# Altium PCB RX_Board.PcbDoc (part 5 of 5)
Units mm, origin at the board's own origin, x right, y up, seen from the top; angles counter-clockwise.
Board outline 69 x 69 mm, 4 copper layers (Top Layer, Int1 (GND), Int2 (GND), Bottom Layer), stack 1.586 mm thick; 118 components, 59 nets, 325 pads, 477 vias.
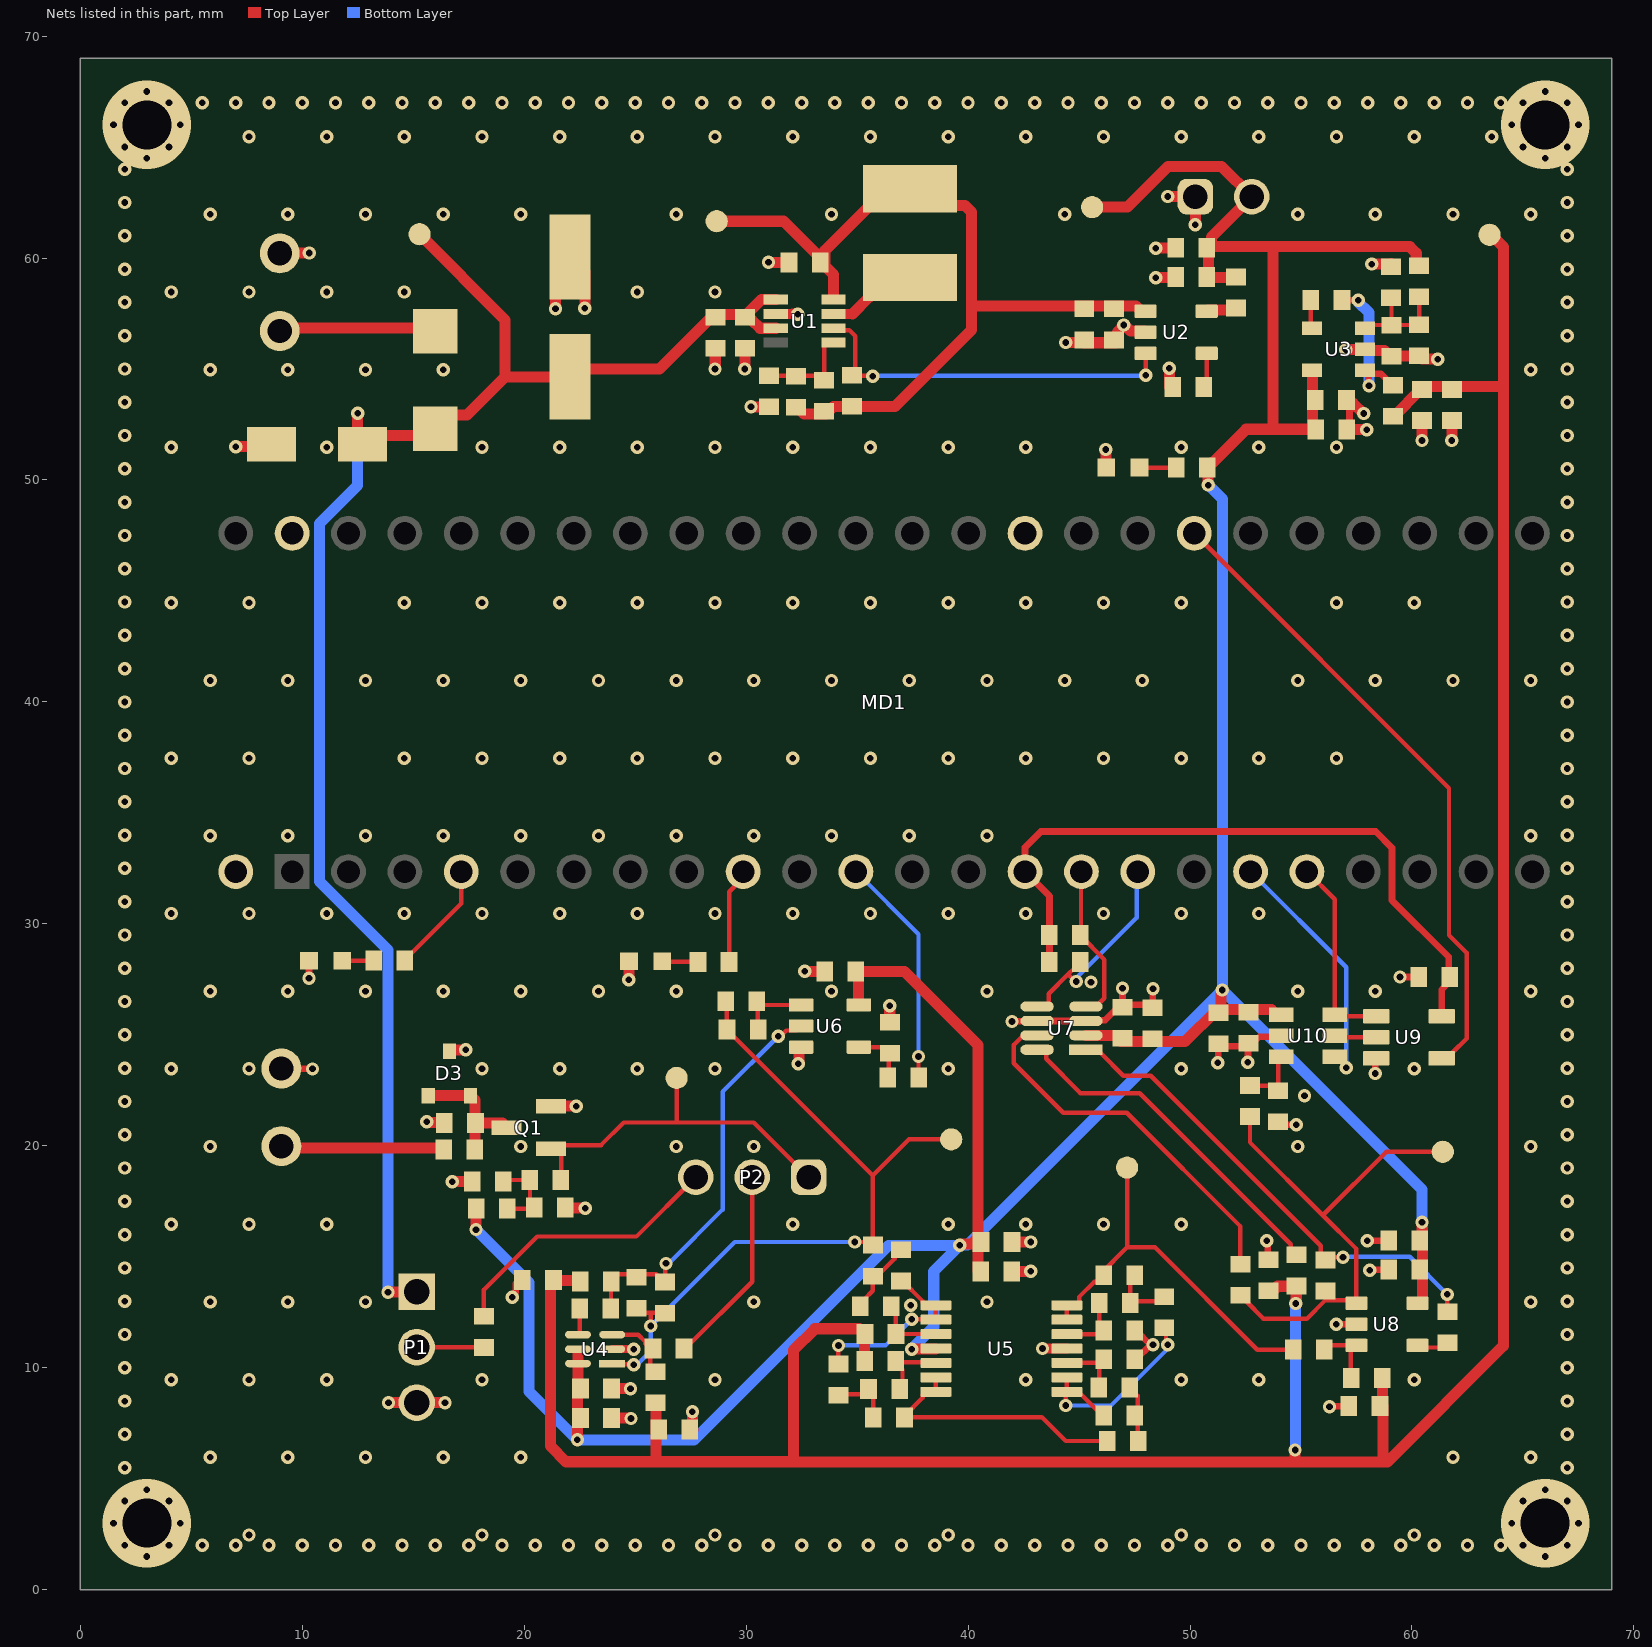
[diagram p4: the nets of this part, all layers, seen from the top]

## Part data (continued)
U4: library part CMP-09116-000031-1, "IC OPAMP VFB 1 CIRCUIT SC70-6", Input Bias Current=-1.2uA, Input Offset Voltage=0.020mV, Manufacturer="Analog Devices", Max Supply Voltage=11V, Min Supply Voltage=2.7V, Nominal Supply Current=1-1000uA, Output Current Per Channel=80mA, Package=KS-6, Temperature="-40°C to +125°C", Temperature Range High=+125°C, Temperature Range Low=-40°C, Voltage Gain=130dB, Automotive=No, Category=IC, ComponentLink2Description=Datasheet, ComponentLink2URL=https://www.analog.com/media/en/technical-documentation/data-sheets/ADA4807-1_4807-2_4807-4.pdf, Device Class L1="Integrated Circuits (ICs)", Device Class L2="Linear ICs", Device Class L3="Amplifiers - Op Amps", Digikey Description="IC OPAMP VFB 1 CIRCUIT SC70-6", Height=1.1mm, Ipc Land Pattern Name=SOT65P210X95-6, Lead Free=Yes, Manufacturer Part Number=ADA4807-1AKSZ-R2, Mouser Description="Operational Amplifiers - Op Amps Ultra Low Pwr 120MHz High Spd R/R AMP", Number of Channels=1, Octopart=https://octopart.com/ada4807-1aksz-r2-analog+devices-52932031, RoHS=TRUE
U5: library part CMP-0272-01739-3, "20 MHz, Low Noise, RRIO, CMOS Operational Amplifier, 1.8 to 5.5 V, -40 to 125 degC, 14-pin SOP (PW14), Green (RoHS & no Sb/Br)", Manufacturer="Texas Instruments", Rating=Catalog, Total Supply Voltage(Max)(+5V is 5, +/-5V is 10)=5.5, Total Supply Voltage(Min)(+5V is 5, +/-5V is 10)=1.8, CMRR(Min)(dB)=90, Code_JEDEC=MO-153, ComponentLink1Description="Manufacturer URL", ComponentLink1URL=http://www.ti.com/, ComponentLink2Description=Datasheet, ComponentLink2URL=http://www.ti.com/lit/ds/symlink/opa4322.pdf, ComponentLink3Description="Package Specification", ComponentLink3URL=http://www.ti.com/litv/pdf/mpds360, DatasheetVersion=SBOS538E, Eco-Plan="Green (RoHS & no Sb/Br)", GBW(Typ)(MHz)=20, IIB(Max)(pA)=10, Iq per channel(Max)(mA)=1.65, Mounting Technology="Surface Mount", Number of Channels=4, Offset Drift(Typ)(uV/C)=1.8, PackageDescription="14-Pin Plastic Small Outline, Body 5 x 4.4 mm, Pitch 0.65 mm", PackageReference=PW0014A, PackageVersion="4040064-3/G, 02/2011", Packing="LARGE T&R", PartNumber=OPA4322AIPWR, Slew Rate(Typ)(V/us)=10, Sub Family="High Output Current Amplifier (>=50mA), Low Input Bias Current Amp (<=10pA), Low Noise Amp (<=10nV/rtHz), Low Supply Voltage Amplifier (<=2.7V), Precision Amplifier", Vio (25C)(Max)(mV)=2
U6: library part CMP-04892-000007-1, "IC SWITCH SPST SOT23-5", Ambient Temperature Range High=+85°C, Ambient Temperature Range Low=-40°C, JLCPCB Part Number=C353035, Manufacturer="Texas Instruments", Max Junction Temp=+150°C, Max Supply Voltage=5.5V, Min Supply Voltage=1.65V, Nominal Supply Current=0.01uA, On State Resistance=0.7Ω, Package=DBV0005A, Temperature="-40°C to +85°C", Automotive=No, Category=IC, ComponentLink2Description=Datasheet, ComponentLink2URL=http://www.ti.com/lit/ds/symlink/ts5a3166.pdf, Device Class L1="Integrated Circuits (ICs)", Device Class L2="Interface ICs", Device Class L3="Analog Switches", Digikey Description="IC SWITCH SPST SOT23-5", Height=1.45mm, Lead Free=Yes, Manufacturer Part Number=TS5A3166DBVR, Mouser Description="1-Ohm SPST Analog Switch 5-V/3.3-V Single-Channel Analog Switch 5-SOT-23 -40 to 85", Number of Circuits=1, Octopart=https://octopart.com/ts5a3166dbvr-texas+instruments-512330, RoHS=TRUE, Standoff Height=0mm, Temperature Range High=+85°C, Temperature Range Low=-40°C, Throw Configuration=SPST-NO
U7: library part CMP-09083-000109-1, "IC DGT POT 10KOHM 256TAP SOT23-8", Case/Package=SOT-23, Frequency=400kHz, JLCPCB Part Number=C144256, Max Operating Temperature=125°C, Max Supply Current=3uA, Max Supply Voltage=5.5V, Min Operating Temperature=-40°C, Min Supply Voltage=2.7V, Package Quantity=3000, Resistance=10kR, Resistance Tolerance=30%, Temperature Coefficient=45ppm/°C, -3db Bandwidth=1.2MHz, Contact Plating=Gold, Interface=I2C, Lead Free="Contains Lead", Memory Type=Volatile, Mount="Surface Mount", Nominal Supply Current=3uA, Number of Circuits=1, Number of Elements=1, Number of Pins=8, Number of Positions=256, Number of Taps=256, Operating Supply Current=3uA, Operating Supply Voltage=5.5V, Packaging="Tape and Reel", Quiescent Current=3uA, Radiation Hardening=No, REACH SVHC="No SVHC", RoHS Compliant=Yes, Series=-, Supply Current=3uA, Taper=Linear, Tolerance=30%
U8: library part CMP-0272-00923-3, "50 MHz, Low-Noise, Single-Supply Rail-to-Rail Operational Amplifier, 2.2 to 5.5 V, -40 to 125 degC, 5-pin SOT23 (DBV5), Green (RoHS & no Sb/Br)", JLCPCB Part Number=C96626, Manufacturer="Texas Instruments", Total Supply Voltage(Max)(+5V is 5, +/-5V is 10)=5.5, Total Supply Voltage(Min)(+5V is 5, +/-5V is 10)=2.2, CMRR(Min)(dB)=100, Code_JEDEC=MO-178, ComponentLink1Description="Manufacturer URL", ComponentLink1URL=http://www.ti.com/, ComponentLink2Description=Datasheet, ComponentLink2URL=http://www.ti.com/general/docs/lit/getliterature.tsp?genericPartNumber=OPA365&fileType=pdf, ComponentLink3Description="Package Specification", ComponentLink3URL=http://www.ti.com/litv/pdf/mpds018i, DatasheetVersion=SBOS365D, Eco-Plan="Green (RoHS & no Sb/Br)", IIB(Max)(pA)=10, Iq per channel(Max)(mA)=5, Mounting Technology="Surface Mount", Number of Channels=1, Offset Drift(Typ)(uV/C)=1, PackageDescription="5-Pin Plastic Small Outline, Body 1.6 x 2.9 mm, Pitch 0.95 mm", PackageReference=DBV0005A, PackageVersion="4073253-4/K, 03/2006", PartNumber=OPA365AIDBVR, Slew Rate(Typ)(V/us)=25, Sub Family="High Speed Amplifier (>=50MHz), Low Input Bias Current Amp (<=10pA), Low Noise Amp (<=10nV/rtHz), Low Offset Voltage Amplifier (<=500uV), Low Supply Voltage Amplifier (<=2.7V)", Vio (25C)(Max)(mV)=0.2
U9: library part CMP-0859-00019-3, "Single Bus Buffer Gate With 3-State Outputs, DBV0005A, LARGE T&R", F @ Nom Voltage(Max)(Mhz)=150, Generic Part Number=SN74LVC1G125, ICC @ Nom Voltage(Max)(mA)=0.01, JLCPCB Part Number=C23654, Manufacturer="Texas Instruments", Operating Temperature Range(C)="-40 to 125,-40 to 85", Rating=Catalog, tpd @ Nom Voltage(Max)(ns)=9,5.5,4.5,4, Voltage(Nom)(V)=1.8,2.5,3.3,5, 3-State Output=Yes, Bits(#)=1, DatasheetVersion=SCES223T, Input Type=CMOS/TTL, Logic=True, Output Drive (IOL/IOH)(Max)(mA)=32/-32, Output Type=CMOS, PackageReference=DBV0005A, Schmitt Trigger=No, Sub-Family="Non-Inverting Buffer/Driver", Technology Family=LVC, VCC(Max)(V)=5.5, VCC(Min)(V)=1.65
U10: library part CMP-0054-00266-2, "Single Channel, 0.5 to 1 MSPS, 12-Bit A/D Converter, 6-pin SOT-23, Pb-Free", JLCPCB Part Number=C74860, Manufacturer="National Semiconductor", PackageTopMarking=X01C*XTT, PowerWise=Y, Code_IPC=SOT26A-6, Code_JEDEC=MO-178-AB, ComponentLink1Description="ADC121S101 Datasheet", ComponentLink1URL=http://www.national.com/ds/AD/ADC121S101.pdf, ComponentLink2Description="ADC121S101 Web Page", ComponentLink2URL=http://www.national.com/pf/AD/ADC121S101.html, ComponentLink3Description="MF06A Package Page", ComponentLink3URL=http://www.national.com/packaging/folders/mf06a.html, CompType="ADC IC", DatasheetVersion=Jun-2004, PackageDescription="Molded SOT-23, .115 x .063 x .040in Body, 6 Lead, .0375in in Pitch", PackageReference=MF06A, PackageVersion="revC, Sep-2005", PinCount=6, RevisionNote="Component URLs added", RoHS=Y

## Via types
v1: diameter 0.6, hole 0.3, Top Layer to Bottom Layer, tented both sides, 473 vias
v2: diameter 4, hole 2.2, Top Layer to Bottom Layer, 4 vias

## Nets (pads, with @x,y where several pads share a name; then routed paths per layer and width w, separated by ;. In a path a pad name is that pad's centre, name@x,y a point inside that pad or via, vN(x,y) a via of type N, cw(c..) or ccw(c..) an arc to the next point about the centre after c; other vN are vias at no path point)
2V5: C13.1 C14.2 C25.2 C34.2 C46.2 C48.2 R3.2 R12.1 R21.1 R23.1 R24.1 R34.2 R36.1 TP4.1 | length 136.1
  Top Layer w0.5: R23.1@22.512,13.89 22.474,13.928 21.487,13.928 21.449,13.966 21.449,13.894 21.18,13.625 21.18,6.473 21.887,5.766 25.94,5.766 ; R12.1@25.93,8.415 25.935,8.41 25.935,7.215 25.94,7.21 25.94,5.766 ; R21.1@35.328,10.309 35.333,10.314 35.333,11.522 35.339,11.528 35.339,11.578 35.259,11.658 35.209,11.658 35.109,11.758 33.094,11.758 32.127,10.791 32.127,5.766 ; C48.2@53.539,13.342 53.612,13.342 53.943,13.673 54.809,13.673 54.784,13.647 54.784,12.925 v1(54.759,12.899) ; v1(54.733,6.295) 54.733,5.762 ; R34.2@58.645,9.547 58.665,9.526 C46.2@58.665,8.184 ; C46.2@58.685,8.277 58.685,5.976 58.899,5.762 ; R3.2@59.153,52.879 59.233,52.959 59.283,52.959 60.298,53.975 60.298,54.126 60.376,54.204 60.448,54.204 61.794,54.204 64.091,54.204 64.131,54.163 ; TP4.1@63.496,61.047 63.588,61.047 64.131,60.504 64.131,54.163 ; 25.94,5.766 32.127,5.766 ; 32.127,5.766 32.127,5.762 54.733,5.762 ; 54.733,5.762 58.899,5.762 ; 58.899,5.762 64.131,10.994 64.131,54.163
  Bottom Layer w0.3: v1(54.733,6.295) v1@54.746,6.308 ; v1@54.746,12.887 v1(54.759,12.899)
  Bottom Layer w0.5: v1@54.746,6.308 v1@54.746,12.887
2V5_OUT: R3.1 R9.2 U3.1 | length 7.1
  Top Layer w0.3: R9.2@56.83,58.1 v1(57.578,58.1) ; v1(58.061,54.24) 58.043,54.257 58.043,54.791 57.893,54.941 U3.1@57.889,54.941 58.039,54.791 58.592,54.791 59.103,54.279 R3.1@59.153,54.279
  Bottom Layer w0.5: v1(57.578,58.1) 57.578,58.019 58.061,57.537 v1(58.061,54.24)
5V: C2.2 C3.1 C15.2 C16.1 C17.2 C18.2 C20.1 C21.2 C36.2 C37.2 C38.2 C40.1 C41.2 C44.2 C45.2 P3.2 R2.2 R10.1 R33.1 R38.2 TP2.1 U3.5 U4.5 U4.6 U5.4 U6.5 U7.2 U8.5 U10.1 | length 172.3
  Top Layer w0.5: v1(17.827,16.227) R10.1@17.827,17.167 ; v1(22.399,6.753) 22.404,6.758 22.404,7.738 22.409,7.743 22.409,9.064 22.417,9.071 22.417,10.185 U4.6@22.424,10.192 22.424,10.639 ; U6.5@35.078,26.346 35.063,26.361 35.063,27.86 37.132,27.859 40.454,24.537 40.454,15.668 40.449,15.663 C21.2@40.449,15.456 ; v1(37.461,10.842) 37.474,10.855 U5.4@38.537,10.855 ; v1(39.62,15.516) 39.678,15.573 40.276,15.573 40.314,15.611 C21.2@40.314,15.725 ; C20.1@40.449,14.352 C21.2@40.449,15.322 ; U7.2@45.31,24.978 46.632,24.978 46.901,24.708 48.294,24.708 48.307,24.695 49.78,24.695 51.207,26.122 51.279,26.122 C45.2@51.292,26.135 ; TP2.1@45.589,62.291 47.189,62.291 49.018,64.12 51.424,64.12 P3.2@52.781,62.763 50.965,60.947 50.965,60.54 50.831,60.406 50.831,59.198 50.887,59.142 50.899,59.131 R38.2@52.066,59.131 ; v1@50.809,49.782 50.809,50.594 50.796,50.606 50.976,50.787 51.026,50.787 52.523,52.284 53.768,52.284 ; R33.1@50.809,50.682 R33.1@50.822,50.669 ; C3.1@50.944,60.519 53.743,60.519 ; v1(51.457,27.022) 51.399,26.964 51.399,26.243 C45.2@51.292,26.135 ; U10.1@54.124,25.921 U10.1@54.117,25.914 53.892,25.914 53.659,26.148 52.625,26.148 52.612,26.135 C45.2@51.292,26.135 ; U3.5@55.521,54.909 55.521,53.605 55.526,53.599 55.526,52.289 55.531,52.284 53.768,52.284 ; R2.2@60.321,59.639 60.271,59.639 60.191,59.719 60.191,60.226 59.898,60.519 53.743,60.519 ; U8.5@60.324,12.91 60.474,13.06 60.474,14.423 60.474,15.744 60.461,15.757 60.461,16.544 v1(60.448,16.557) ; 53.743,60.519 53.743,52.309 53.768,52.284
  Bottom Layer w0.5: v1(17.827,16.227) 20.215,13.839 20.215,8.937 v1(22.399,6.753) 27.657,6.753 36.42,15.516 v1(39.62,15.516) ; v1(37.461,10.842) 38.452,11.833 38.452,14.347 v1(39.62,15.516) ; v1(50.822,49.769) 51.457,49.134 v1(51.457,27.022) ; v1(60.448,16.557) 60.448,18.03 v1(51.457,27.022) ; v1(39.62,15.516) 39.639,15.535 39.97,15.535 v1(51.457,27.022)
5V25: C1.2 C6.1 C7.2 C10.2 L1.2 R1.2 R4.1 TP1.1 U1.8 U2.1 | length 38.7
  Top Layer w0.5: TP1.1@28.673,61.656 31.681,61.656 C10.2@33.457,59.88 ; R1.2@32.254,53.286 32.304,53.286 32.618,52.972 C1.2@33.517,52.972 ; C1.2@33.59,52.972 33.929,53.311 34.769,53.311 36.71,53.311 40.154,56.754 40.154,57.821 ; U1.8@33.935,58.354 33.935,59.258 33.541,59.652 33.541,60.327 36.337,63.123 L1.2@37.385,63.123 38.142,62.366 39.861,62.366 40.154,62.073 40.154,57.821 ; U2.1@47.999,57.603 47.799,57.603 47.565,57.836 46.58,57.836 45.234,57.836 40.169,57.836 40.154,57.821
5V_LDO: R38.1 U2.5 | length 1.4
  Top Layer w0.5: U2.5@50.749,57.603 50.813,57.667 52.002,57.667 R38.1@52.066,57.731
5V_PG: R4.2 U1.6 U2.3 | length 17.2
  Top Layer w0.2: U1.6@33.935,56.836 34.018,56.753 34.652,56.753 34.921,56.483 34.921,54.863 34.769,54.711 34.789,54.691 35.689,54.691 v1(35.709,54.671) ; U2.3@47.999,55.703 48.002,55.699 v1(48.002,54.722)
  Bottom Layer w0.2: v1(35.709,54.671) 35.734,54.697 47.977,54.697 v1(48.002,54.722)
AMP_OUT: C42.2 R31.1 R32.1 TP8.1 U8.1 | length 23.3
  Top Layer w0.2: R31.1@52.269,13.252 52.319,13.252 52.549,13.022 52.549,12.972 53.308,12.214 55.267,12.214 56.105,13.052 ; R32.1@52.701,21.307 52.701,20.153 55.985,16.869 ; C42.2@56.105,13.331 56.105,13.052 ; TP8.1@61.388,19.732 58.848,19.732 55.985,16.869 ; 55.985,16.869 57.498,15.356 U8.1@57.498,12.91 57.356,13.052 56.105,13.052
BP_OUT: C33.2 C39.1 TP7.1 U5.13 U5.14 | length 17.5
  Top Layer w0.2: U5.13@44.45,12.167 U5.14@44.45,12.817 44.875,12.817 45,12.942 45,13.189 45.681,13.869 45.753,13.869 45.981,14.097 45.981,14.169 45.981,14.242 47.164,15.425 ; TP7.1@47.164,19.021 47.164,15.425 ; C39.1@54.515,10.817 53.03,10.817 48.421,15.425 47.164,15.425
Buck_SW: L1.1 U1.7 | length 4.2
  Top Layer w0.45: U1.7@33.935,57.486 34.785,57.486
  Top Layer w0.5: 34.785,57.486 35.525,58.225 35.525,58.311 36.337,59.123 L1.1@37.385,59.123
G: C24.1 R13.1 R15.1 R23.2 U6.2 | length 18.4
  Top Layer w0.2: R15.1@23.912,12.671 23.912,13.89 23.912,13.94 24.142,14.17 24.192,14.17 24.232,14.21 25.066,14.21 25.955,14.21 26.286,13.879 26.361,13.954 26.361,14.677 v1(26.387,14.703) ; v1(31.441,24.939) 31.55,24.939 31.807,25.196 32.278,25.196 U6.2@32.478,25.396
  Bottom Layer w0.2: v1(26.387,14.703) 26.514,14.703 28.939,17.128 28.939,22.437 v1(31.441,24.939)
GAIN_OUT: C24.2 C29.1 C35.1 R13.2 R26.1 TP5.1 U4.1 | length 34.2
  Top Layer w0.2: U4.1@23.965,10.192 23.995,10.161 24.908,10.161 v1(24.939,10.131) ; C24.2@25.066,12.554 25.141,12.479 25.739,12.479 ; v1(25.701,11.883) 25.701,12.441 25.739,12.479 ; R13.2@26.336,12.479 25.739,12.479 ; C35.1@28.948,26.514 29.128,26.333 R26.1@29.128,25.556 ; R26.1@29.127,25.244 29.127,25.194 29.357,24.964 29.407,24.964 35.709,18.662 ; v1(34.896,15.668) 35.698,15.668 35.709,15.658 35.709,18.662 ; TP5.1@39.239,20.291 37.337,20.291 35.709,18.662
  Bottom Layer w0.2: v1(24.939,10.131) 25.016,10.207 25.153,10.207 25.701,10.755 v1(25.701,11.883) 29.486,15.668 v1(34.896,15.668)
GND: C2.1 C3.2 C4.1 C5.2 C6.2 C7.1 C8.1 C9.1 C10.1 C11.1 C12.2 C13.2 C14.1 C15.1 C16.2 C17.1 C18.1 C20.2 C21.1 C22.1 C23.1 C25.1 C28.1 C31.1 C34.1 C36.1 C37.1 C38.1 C40.2 C41.1 C43.1 C44.1 C45.1 C46.1 C47.1 C48.1 D2.2 D3.3 D4.1 D5.1 D6.1 J1.1 J2.1 MD1.43 MD1.45 MD1.46 P1.3 P3.1 Q1.2 R5.1 R7.2 R20.1 R28.1 U1.2 U2.2 U3.2 U4.2 U5.11 U6.3 U7.3 U7.6 U8.2 U9.3 U10.2 | length 71.7
  Top Layer w0.3: J2.1@9.064,23.486 9.074,23.476 10.451,23.476 v1(10.461,23.466) ; v1(10.309,27.555) D4.1@10.308,28.342 ; v1(19.465,13.179) 19.465,13.26 19.615,13.411 19.615,13.788 C34.1@19.793,13.966 ; v1(41.982,25.599) 41.996,25.613 43.095,25.613 U7.6@43.109,25.628 U7.3@45.31,25.628 45.339,25.657 46.169,25.657 46.889,26.376 C36.1@46.961,26.376 ; v1(46.961,27.098) C36.1@46.961,26.376 ; C31.1@47.636,10.385 47.636,10.457 48.167,10.988 48.275,10.988 v1(48.332,11.045) 48.275,11.103 48.142,11.103 47.636,11.608 C28.1@47.636,11.68 ; v1(48.332,27.073) 48.32,27.06 48.32,26.364 48.307,26.351 48.294,26.364 46.974,26.364 C36.1@46.961,26.376 ; v1(51.253,23.745) 51.266,23.758 51.266,24.454 51.279,24.467 51.292,24.48 52.612,24.48 52.612,23.783 v1(52.6,23.771) ; C44.1@52.697,24.492 53.117,24.912 54.065,24.912 U10.2@54.117,24.964 ; v1(53.463,15.719) 53.501,15.681 53.501,15.175 53.552,15.124 C48.1@53.565,15.124 ; C43.1@53.971,20.962 53.976,20.956 54.779,20.956 v1(54.784,20.951) ; v1(56.283,8.251) 56.295,8.264 57.017,8.264 C46.1@57.03,8.277 ; v1(56.587,11.96) U8.2@57.498,11.96 ; C16.2@57.176,53.605 57.181,53.599 57.181,53.527 57.181,52.289 C15.1@57.187,52.284 ; v1(57.984,15.719) 57.997,15.732 58.729,15.732 C41.1@58.742,15.744 ; v1(58.098,14.398) 58.111,14.411 58.729,14.411 C40.2@58.742,14.423 ; v1(58.34,23.263) 58.34,23.889 U9.3@58.389,23.938 ; v1(59.458,27.606) C47.1@60.179,27.606
  Top Layer w0.35: U4.2@23.965,10.842 v1(24.939,10.842)
  Top Layer w0.45: U1.2@31.335,57.486 v1@32.097,57.486 ; v1(43.354,10.867) U5.11@44.45,10.867
  Top Layer w0.5: v1(7,51.5) 8.51,51.5 D2.2@8.614,51.605 ; J1.1@8.988,60.21 8.995,60.217 10.306,60.217 v1(10.312,60.223) ; v1(13.89,8.429) P1.3@15.16,8.429 v1(16.43,8.429) ; v1(15.617,21.078) 15.636,21.059 16.359,21.059 R20.1@16.39,21.027 ; D3.3@16.633,24.263 16.681,24.31 17.351,24.31 v1(17.37,24.329) ; v1(16.76,18.386) C22.1@17.533,18.386 ; Q1.2@21.215,21.784 21.217,21.787 22.346,21.787 v1(22.348,21.789) ; v1(21.412,57.709) 21.412,59.388 C5.2@22.069,60.045 22.733,59.381 v1(22.733,57.734) ; C23.1@21.982,17.217 21.995,17.205 22.742,17.205 v1(22.755,17.192) ; C17.1@24.065,7.743 24.078,7.731 24.799,7.731 v1(24.812,7.718) ; C18.1@24.065,9.064 24.071,9.058 24.787,9.058 v1(24.792,9.053) ; v1(24.71,27.479) 24.716,27.485 24.716,28.311 D5.1@24.722,28.317 ; v1(27.581,8.023) 27.588,8.015 27.588,7.217 C25.1@27.596,7.21 ; v1(28.597,55.002) 28.609,55.014 28.609,55.787 C8.1@28.622,55.799 ; v1(29.943,55.002) C9.1@29.943,55.799 ; v1(30.222,53.3) 30.229,53.293 31.028,53.293 R5.1@31.035,53.286 ; v1(31.01,59.802) C10.1@31.807,59.802 ; v1@32.097,57.486 32.098,57.485 32.311,57.485 v1(32.33,57.465) ; v1(32.356,23.694) 32.375,23.714 32.375,24.396 32.425,24.446 U6.3@32.478,24.446 ; v1(32.635,27.86) C38.1@33.408,27.86 ; R28.1@36.471,25.588 v1(36.471,26.311) ; C20.2@42.099,14.347 v1(42.821,14.347) ; C21.1@42.109,15.668 v1(42.821,15.668) ; v1(44.395,56.195) 44.403,56.188 45.226,56.188 45.234,56.18 46.58,56.18 46.652,56.18 46.73,56.258 46.73,56.674 47.012,56.956 v1(47.012,56.983) 47.039,56.983 47.319,56.703 47.949,56.703 U2.2@47.999,56.653 ; v1(46.199,51.369) 46.211,51.357 46.211,50.569 D6.1@46.223,50.557 ; v1(48.459,59.116) 48.472,59.129 49.219,59.129 C2.1@49.232,59.142 ; v1(48.459,60.437) 48.472,60.45 49.219,60.45 C3.2@49.232,60.463 ; v1(48.993,62.774) 50.288,62.774 P3.1@50.237,62.723 ; v1(49.069,55.027) 49.079,55.017 49.079,54.199 C4.1@49.09,54.189 ; v1@50.241,61.508 50.239,61.51 P3.1@50.241,62.763 P3.1@50.241,62.763 ; v1(57.019,55.865) 57.032,55.878 57.876,55.878 U3.2@57.889,55.891 57.939,55.841 58.769,55.841 59.027,55.583 59.077,55.583 60.321,55.583 60.451,55.453 61.14,55.453 v1(61.159,55.433) ; C16.2@57.176,53.532 57.181,53.527 57.254,53.455 57.345,53.455 57.805,52.995 v1(57.832,52.995) ; C15.1@57.187,52.284 57.199,52.271 57.946,52.271 v1(57.959,52.258) ; v1(58.188,59.726) 58.195,59.733 59.044,59.733 C11.1@59.051,59.741 ; v1(60.448,51.776) C13.2@60.448,52.548 ; v1(61.794,51.776) C14.1@61.794,52.548
  other v1: 3,1.5 66,1.5 2,2 4,2 5.5,2 7,2 8.5,2 10,2 11.5,2 13,2 14.5,2 16,2 17.5,2 19,2 20.5,2 22,2 23.5,2 25,2 26.5,2 28,2 29.5,2 31,2 32.5,2 34,2 35.5,2 37,2 38.5,2 40,2 41.5,2 43,2 44.5,2 46,2 47.5,2 49,2 50.5,2 52,2 53.5,2 55,2 56.5,2 58,2 59.5,2 61,2 62.5,2 64,2 65,2 67,2 7.6,2.468 18.1,2.468 28.6,2.468 39.1,2.468 49.6,2.468 60.1,2.468 1.5,3 4.5,3 64.5,3 67.5,3 2,4 4,4 65,4 67,4 3,4.5 66,4.5 2,5.5 67,5.5 5.85,5.968 9.35,5.968 12.85,5.968 16.35,5.968 19.85,5.968 61.85,5.968 65.35,5.968 2,7 67,7 2,8.5 67,8.5 4.1,9.468 7.6,9.468 11.1,9.468 18.1,9.468 28.6,9.468 42.6,9.468 49.6,9.468 53.1,9.468 60.1,9.468 2,10 67,10 2,11.5 67,11.5 37.41,12.823 5.85,12.968 9.35,12.968 12.85,12.968 30.35,12.968 40.85,12.968 65.35,12.968 2,13 67,13 2,14.5 67,14.5 2,16 67,16 4.1,16.468 7.6,16.468 11.1,16.468 32.1,16.468 39.1,16.468 42.6,16.468 46.1,16.468 49.6,16.468 2,17.5 67,17.5 2,19 67,19 5.85,19.968 19.85,19.968 26.85,19.968 30.35,19.968 54.85,19.968 65.35,19.968 2,20.5 67,20.5 2,22 67,22 55.155,22.262 4.1,23.468 7.6,23.468 18.1,23.468 21.6,23.468 25.1,23.468 28.6,23.468 39.1,23.468 49.6,23.468 60.1,23.468 2,23.5 67,23.5 2,25 67,25 2,26.5 67,26.5 5.85,26.968 9.35,26.968 12.85,26.968 16.35,26.968 19.85,26.968 23.35,26.968 26.85,26.968 33.85,26.968 40.85,26.968 54.85,26.968 58.35,26.968 65.35,26.968 45.538,27.377 2,28 67,28 2,29.5 67,29.5 4.1,30.468 7.6,30.468 11.1,30.468 14.6,30.468 18.1,30.468 21.6,30.468 25.1,30.468 28.6,30.468 32.1,30.468 35.6,30.468 39.1,30.468 42.6,30.468 46.1,30.468 49.6,30.468 53.1,30.468 2,31 67,31 2,32.5 67,32.5 5.85,33.968 9.35,33.968 12.85,33.968 16.35,33.968 19.85,33.968 23.35,33.968 26.85,33.968 30.35,33.968 33.85,33.968 37.35,33.968 40.85,33.968 65.35,33.968 2,34 67,34 2,35.5 67,35.5 2,37 67,37 4.1,37.468 7.6,37.468 14.6,37.468 18.1,37.468 21.6,37.468 25.1,37.468 28.6,37.468 32.1,37.468 35.6,37.468 39.1,37.468 42.6,37.468 46.1,37.468 49.6,37.468 53.1,37.468 56.6,37.468 2,38.5 67,38.5 2,40 67,40 5.85,40.968 9.35,40.968 12.85,40.968 16.35,40.968 19.85,40.968 23.35,40.968 26.85,40.968 30.35,40.968 33.85,40.968 37.35,40.968 40.85,40.968 44.35,40.968 47.85,40.968 54.85,40.968 58.35,40.968 61.85,40.968 65.35,40.968 2,41.5 67,41.5 2,43 67,43 4.1,44.468 7.6,44.468 14.6,44.468 18.1,44.468 21.6,44.468 25.1,44.468 28.6,44.468 32.1,44.468 35.6,44.468 39.1,44.468 42.6,44.468 46.1,44.468 49.6,44.468 56.6,44.468 60.1,44.468 2,44.5 67,44.5 2,46 67,46 2,47.5 67,47.5 2,49 67,49 2,50.5 67,50.5 4.1,51.468 11.1,51.468 18.1,51.468 21.6,51.468 25.1,51.468 28.6,51.468 32.1,51.468 35.6,51.468 39.1,51.468 42.6,51.468 49.6,51.468 53.1,51.468 56.6,51.468 2,52 67,52 2,53.5 67,53.5 5.85,54.968 9.35,54.968 12.85,54.968 16.35,54.968 65.35,54.968 2,55 67,55 2,56.5 67,56.5 2,58 67,58 4.1,58.468 7.6,58.468 11.1,58.468 14.6,58.468 25.1,58.468 28.6,58.468 2,59.5 67,59.5 2,61 67,61 50.237,61.504 5.85,61.968 9.35,61.968 12.85,61.968 16.35,61.968 19.85,61.968 26.85,61.968 33.85,61.968 44.35,61.968 54.85,61.968 58.35,61.968 61.85,61.968 65.35,61.968 2,62.5 67,62.5 2,64 67,64 3,64.5 66,64.5 2,65 4,65 65,65 67,65 7.6,65.468 11.1,65.468 14.6,65.468 18.1,65.468 21.6,65.468 25.1,65.468 28.6,65.468 32.1,65.468 35.6,65.468 39.1,65.468 42.6,65.468 46.1,65.468 49.6,65.468 53.1,65.468 56.6,65.468 60.1,65.468 63.6,65.468 1.5,66 4.5,66 64.5,66 67.5,66 2,67 4,67 5.5,67 7,67 8.5,67 10,67 11.5,67 13,67 14.5,67 16,67 17.5,67 19,67 20.5,67 22,67 23.5,67 25,67 26.5,67 28,67 29.5,67 31,67 32.5,67 34,67 35.5,67 37,67 38.5,67 40,67 41.5,67 43,67 44.5,67 46,67 47.5,67 49,67 50.5,67 52,67 53.5,67 55,67 56.5,67 58,67 59.5,67 61,67 62.5,67 64,67 65,67 67,67 3,67.5 66,67.5
  other v2: 3,3 66,3 3,66 66,66
HYD+: J2.2 R14.1 | length 7.4
  Top Layer w0.2: J2.2@9.064,19.986 J2.2@9.14,19.91 ; R14.1@16.289,19.91 R14.1@16.365,19.834
  Top Layer w0.5: J2.2@9.14,19.91 R14.1@16.289,19.91
I2C2_SCL: MD1.24 R8.1 U7.4 | length 7.1
  Top Layer w0.2: R8.1@45.07,29.461 46.138,28.393 46.138,26.65 45.766,26.278 U7.4@45.31,26.278 ; R8.1@45.07,29.511 45.088,29.529 45.088,32.337 MD1.24@45.107,32.356
I2C2_SDA: MD1.25 R6.1 U7.5 | length 9.7
  Top Layer w0.2: U7.5@43.109,26.278 43.515,26.278 43.633,26.395 43.633,26.855 44.504,27.726 ; v1(44.878,27.403) 44.827,27.403 44.504,27.726 ; R6.1@45.07,28.292 45.07,28.242 44.84,28.012 44.79,28.012 44.504,27.726
  Bottom Layer w0.2: v1(44.878,27.403) 44.955,27.479 44.955,27.642 47.596,30.283 47.596,32.305 MD1.25@47.647,32.356
LED_HB: MD1.8 R30.1 | length 4.3
  Top Layer w0.2: R30.1@29.246,28.292 29.246,31.442 29.867,32.063 MD1.8@29.867,32.356
LED_TX: MD1.3 R29.1 | length 5.1
  Top Layer w0.2: R29.1@14.641,28.343 14.641,28.392 17.167,30.918 MD1.3@17.167,32.356
LNA_OUT: P2.1 Q1.1 R11.1 TP6.1 | length 16.5
  Top Layer w0.2: Q1.1@21.215,19.864 21.565,19.864 21.736,20.036 23.465,20.036 24.482,21.053 26.869,21.053 ; Q1.1@21.501,19.801 21.662,19.639 R11.1@21.662,18.462 ; TP6.1@26.869,23.059 26.869,21.053 ; P2.1@32.813,18.589 30.349,21.053 26.869,21.053
NetC1_1: C1.1 R1.1 R5.2 U1.5 | length 4.4
  Top Layer w0.2: R5.2@31.035,54.686 32.254,54.686 33.459,54.686 33.517,54.627 33.517,56.061 33.643,56.186 U1.5@33.935,56.186
NetC4_2: C4.2 U2.4 | length 1.5
  Top Layer w0.2: C4.2@50.745,54.189 50.749,54.192 U2.4@50.749,55.703
NetC11_2: C11.2 C12.1 R2.1 R7.1 U3.3 | length 4.8
  Top Layer w0.2: U3.3@57.889,56.841 58.031,56.983 R7.1@59.077,56.983 ; C11.2@59.051,58.085 59.077,58.06 R7.1@59.077,56.983 ; R2.1@60.321,58.239 60.321,57.125 60.179,56.983 R7.1@59.077,56.983
NetC19_2: C19.2 R12.2 U4.3 | length 3.2
  Top Layer w0.2: U4.3@23.965,11.492 25.138,11.492 25.448,11.182 25.448,11.095 25.676,10.867 25.676,10.045 25.906,9.815 R12.2@25.93,9.815
NetC22_2: C22.2 C23.2 R10.2 R11.2 | length 3.5
  Top Layer w0.2: C22.2@19.188,18.386 19.264,18.462 20.262,18.462 20.262,17.282 20.327,17.217 20.276,17.167 R10.2@19.227,17.167
NetC26_1: C26.1 R25.2 U5.1 U5.2 | length 8.2
  Top Layer w0.2: C26.1@34.159,10.4 v1(34.159,11.008) ; R25.2@36.979,13.927 37.028,13.927 37.95,13.005 37.95,12.942 38.075,12.817 U5.1@38.55,12.817 U5.2@38.55,12.167 38.539,12.178 37.472,12.178 v1(37.461,12.188)
  Bottom Layer w0.2: v1(34.159,11.008) 36.281,11.008 v1(37.461,12.188)
NetC26_2: C26.2 C27.1 R22.1 | length 2.7
  Top Layer w0.2: C26.2@34.159,8.643 34.327,8.81 35.161,8.81 C27.1@35.389,9.038 ; C27.1@35.389,8.966 35.72,8.635 R22.1@35.72,7.769
NetC27_2: C27.2 R21.2 U5.5 | length 3.3
  Top Layer w0.2: C27.2@37.044,9.039 37.044,9.942 36.728,10.259 36.728,10.309 36.794,10.242 38.525,10.242 U5.5@38.55,10.217
NetC28_2: C28.2 R17.2 U5.12 | length 2.9
  Top Layer w0.2: U5.12@44.45,11.517 45.818,11.517 45.981,11.68 45.916,11.744 R17.2@45.916,12.925
NetC29_2: C29.2 C30.1 R25.1 | length 3.5
  Top Layer w0.2: C30.1@35.008,12.772 35.008,12.845 35.236,13.072 35.308,13.072 35.709,13.473 35.709,14.002 35.781,14.002 36.699,14.92 36.699,15.096 36.929,15.327 R25.1@36.979,15.327
NetC30_2: C30.2 R24.2 U5.3 | length 3.1
  Top Layer w0.2: C30.2@36.663,12.772 36.739,12.697 36.739,11.528 36.744,11.523 38.545,11.523 U5.3@38.55,11.517
NetC31_2: C31.2 R19.2 U5.10 | length 2.9
  Top Layer w0.2: U5.10@44.45,10.217 45.813,10.217 C31.2@45.905,10.309 ; R19.2@45.905,9.115 45.905,10.217 C31.2@45.905,10.309 ; C31.2@45.905,10.309 45.981,10.385 C31.2@45.905,10.309
NetC32_1: C32.1 R18.2 R19.1 | length 2.6
  Top Layer w0.2: R19.1@47.305,9.115 47.305,9.065 47.636,8.734 47.636,6.726 R18.2@47.661,6.702
NetC32_2: C32.2 R16.1 U5.8 U5.9 | length 10
  Top Layer w0.2: v1(44.395,8.302) 44.395,8.863 U5.8@44.45,8.917 ; U5.9@44.45,9.567 U5.8@44.45,8.917 ; C32.2@45.981,7.845 45.981,7.917 45.105,8.792 44.575,8.792 U5.8@44.45,8.917 ; R16.1@48.84,11.793 48.917,11.717 48.917,11.121 v1(48.993,11.045)
  Bottom Layer w0.2: v1(44.395,8.302) 46.438,8.302 48.916,10.781 48.916,10.969 v1(48.993,11.045)
NetC33_1: C33.1 R16.2 R17.1 | length 3
  Top Layer w0.2: C33.1@47.636,14.169 47.636,14.097 47.316,13.777 47.316,12.925 47.394,13.003 48.65,13.003 R16.2@48.84,13.193
NetC35_2: C35.2 R26.2 U6.1 | length 3
  Top Layer w0.2: R26.2@30.527,25.244 30.527,26.438 C35.2@30.603,26.514 ; C35.2@30.771,26.346 U6.1@32.478,26.346
NetC39_2: C39.2 R34.1 U8.3 | length 3
  Top Layer w0.2: C39.2@56.171,10.817 56.364,11.01 U8.3@57.498,11.01 57.445,11.01 57.245,10.81 R34.1@57.245,9.547
NetC43_2: C43.2 R32.2 U10.3 | length 2.8
  Top Layer w0.2: R32.2@52.701,22.707 53.882,22.707 53.971,22.617 53.971,23.868 U10.3@54.117,24.014
NetD3_1: D3.1 D3.2 Q1.3 R14.2 R20.2 | length 5.9
  Top Layer w0.5: D3.1@15.683,22.263 D3.2@17.583,22.263 17.783,22.063 17.783,21.035 R20.2@17.79,21.027 ; R14.2@17.765,19.834 17.778,19.846 17.778,21.015 R20.2@17.79,21.027 ; Q1.3@19.215,20.824 19.011,21.027 R20.2@17.79,21.027
NetD4_2: D4.2 R29.2 | length 1.4
  Top Layer w0.2: D4.2@11.807,28.343 R29.2@13.241,28.343
NetD5_2: D5.2 R30.2 | length 1.6
  Top Layer w0.2: D5.2@26.222,28.317 26.248,28.292 R30.2@27.846,28.292
NetD6_2: D6.2 R33.2 | length 1.7
  Top Layer w0.2: D6.2@47.723,50.557 R33.2@49.396,50.557
NetP1_2: P1.2 R37.2 | length 3.2
  Top Layer w0.2: P1.2@15.16,10.929 15.165,10.924 18.177,10.924 18.183,10.918 R37.2@18.31,10.918
NetR9_1: R9.1 U3.4 | length 1.3
  Top Layer w0.2: R9.1@55.43,58.1 55.43,56.899 U3.4@55.489,56.841
NetR15_2: R15.2 U4.4 | length 1.2
  Top Layer w0.2: U4.4@22.424,11.492 22.449,11.492 22.512,11.555 R15.2@22.512,12.671
NetR18_1: R18.1 R22.2 U5.6 U5.7 | length 12.3
  Top Layer w0.2: R22.2@37.12,7.769 43.329,7.769 44.395,6.702 R18.1@46.261,6.702 ; R22.2@37.12,7.818 37.95,8.648 37.95,8.792 38.075,8.917 U5.7@38.55,8.917 U5.6@38.55,9.567 38.528,9.546 U5.6@38.528,9.496
NetR27_1: R27.1 R28.2 U6.4 | length 2.6
  Top Layer w0.2: U6.4@35.078,24.446 36.163,24.446 36.421,24.188 36.471,24.188 36.42,24.137 36.42,23.136 R27.1@36.369,23.085
NetR35_1: R35.1 U8.4 | length 1.5
  Top Layer w0.2: U8.4@60.248,11.01 60.345,10.913 61.397,10.913 R35.1@61.591,11.107
NetU9_2: U9.2 U10.5 | length 1.9
  Top Layer w0.2: U10.5@56.517,24.964 56.594,24.888 U9.2@58.389,24.888
PA4_OUT: P2.3 R37.1 | length 12.8
  Top Layer w0.2: R37.1@18.183,12.329 18.183,13.508 20.589,15.914 25.058,15.914 P2.3@27.733,18.589
POT_A: R36.2 U7.8 | length 15.9
  Top Layer w0.2: U7.8@43.109,24.328 43.401,24.328 43.519,24.21 43.519,23.917 45.063,22.374 47.733,22.374 54.265,15.842 54.54,15.566 54.54,15.303 54.77,15.073 R36.2@54.809,15.073
POT_B: R31.2 U7.7 | length 17
  Top Layer w0.2: U7.7@43.109,24.978 43.06,24.929 42.439,24.929 42.056,24.546 42.056,23.722 44.294,21.485 47.153,21.485 52.269,16.368 R31.2@52.269,14.652
POT_W: C42.1 R35.2 U7.1 | length 21.9
  Top Layer w0.2: U7.1@45.31,24.328 45.835,24.328 45.962,24.2 45.962,24.19 46.992,23.161 48.231,23.161 55.894,15.497 55.894,15.197 C42.1@56.105,14.987 ; C42.1@56.037,14.982 v1(56.892,14.982) ; R35.2@61.591,12.507 v1(61.591,13.306)
  Bottom Layer w0.2: v1(56.892,14.982) 56.908,14.998 59.899,14.998 v1(61.591,13.306)
PRE_OUT: C19.1 P2.2 | length 8.9
  Top Layer w0.2: C19.1@27.331,10.867 27.331,10.94 30.273,13.881 P2.2@30.273,18.589
RX_GAIN_SEL: MD1.10 R27.2 | length 10.4
  Top Layer w0.2: v1(37.766,24.025) 37.768,24.023 37.768,23.086 R27.2@37.769,23.085
  Bottom Layer w0.2: MD1.10@34.947,32.356 37.766,29.536 v1(37.766,24.025)
SPI1_CS: MD1.28 U9.1 U10.6 | length 8.9
  Top Layer w0.2: MD1.28@55.267,32.356 56.517,31.105 U10.6@56.517,25.914 56.594,25.838 U9.1@58.389,25.838
SPI1_MISO: MD1.39 U9.4 | length 29.4
  Top Layer w0.2: MD1.39@50.187,47.596 61.667,36.115 61.667,29.486 62.463,28.69 62.463,24.836 61.839,24.212 61.839,24.163 61.614,23.938 U9.4@61.339,23.938
SPI1_SCK: MD1.27 U10.4 | length 11.5
  Top Layer w0.2: U10.4@56.517,24.014 56.742,24.014 56.967,23.789 56.967,23.588 v1(57.042,23.514)
  Bottom Layer w0.2: MD1.27@52.727,32.356 57.042,28.041 v1(57.042,23.514)
Teensy_3V3: C47.2 MD1.47 R6.2 R8.2 U9.5 | length 31.7
  Top Layer w0.3: R6.2@43.67,28.292 43.67,29.511 43.67,31.252 MD1.47@42.567,32.356 42.567,33.448 43.278,34.159 58.365,34.159 59.102,33.423 59.102,31.06 61.657,28.505 61.657,27.712 61.835,27.534 61.339,27.038 U9.5@61.339,25.838
VIN: C5.1 C8.2 C9.2 D1.K D2.1 P1.1 TP3.1 U1.1 U1.3 | length 74.4
  Top Layer w0.15: P1.1@15.138,13.407 P1.1@15.16,13.429
  Top Layer w0.5: v1(12.5,53) 12.5,51.819 D2.1@12.714,51.605 ; D2.1@13.5,52 15.7,52 D1.K@16,52.3 16.63,52.93 17.43,52.93 19.145,54.645 ; v1(13.865,13.407) P1.1@15.138,13.407 ; TP3.1@15.287,61.072 19.145,57.214 19.145,54.645 ; U1.3@31.335,56.836 30.627,56.836 30.268,57.195 30.268,57.202 C9.2@30.015,57.455 ; U1.1@31.335,58.136 30.696,58.136 C9.2@30.015,57.455 ; 19.145,54.645 C5.1@22.069,54.645 22.424,55 26.095,55 28.55,57.455 28.622,57.455 29.943,57.455 C9.2@30.015,57.455
  Bottom Layer w0.5: v1(12.5,53) 12.5,49.756 10.782,48.037 10.782,31.914 13.865,28.831 v1(13.865,13.407)
VIN_Supply: D1.A J1.2 | length 7.1
  Top Layer w0.5: J1.2@8.988,56.71 9.119,56.841 15.859,56.841 D1.A@16,56.7
pads on no net: MD1.0 MD1.1 MD1.2 MD1.4 MD1.5 MD1.6 MD1.7 MD1.9 MD1.11 MD1.12 MD1.13 MD1.14 MD1.15 MD1.16 MD1.17 MD1.18 MD1.19 MD1.20 MD1.21 MD1.22 MD1.23 MD1.26 MD1.29 MD1.30 MD1.31 MD1.32 MD1.33 MD1.34 MD1.35 MD1.36 MD1.37 MD1.38 MD1.40 MD1.41 MD1.42 MD1.44 U1.4

## Polygon pours and split planes (outlines as drawn)
GND on Int1 (GND) "GND_L02_P608" (solid, pour order 608): 0,0 0,69 69,69 69,0
GND on Int2 (GND) "GND_L03_P609" (solid, pour order 609): 0,0 0,69 69,69 69,0
GND on Bottom Layer "GND_L04_P610" (solid, pour order 610): 0,0 0,69 69,69 69,0
GND on Top Layer "GND_L01_P611" (solid, pour order 611): 0,0 0,69 69,69 69,0

## Silkscreen, mask and mechanical layers (free items; w line width, h text height)
Top Overlay:
  region: 25.527,39.726 27.559,37.694 27.559,41.758
  lines w1: 26.797,39.726 48.387,39.726
  text "Acoustic Modem Receiver" at 12.946,65.235 h4
  text "Gnd" at 45.735,63.19 h1
  text "+5V" at 54.582,62.304 h1
  text "-" at 4.445,61.951 h1.52 r90
  text "-" at 14.198,59.715 h1.52 r90
  text "IN" at 2.896,59.665 h1.52 r270
  text "+" at 14.249,56.337 h1.52 r90
  text "+" at 4.343,54.077 h1.52 r90
  text "Teensy 4.1" at 31.115,40.995 h1.52
  text "USB" at 12.344,38.151 h1.52 r90
  text "SDCard" at 62.332,35.763 h1.52 r90
  text "Gnd" at 4.29,25.626 h1
  text "HYD" at 3.302,23.8 h1.52 r270
  text "LNA" at 1.293,23.243 h1 r270
  text "LNA" at 31.824,20.597 h1
  text "PA4" at 25.982,20.546 h1
  text "+HYD" at 4.9,16.838 h1
  text "IN+" at 3.604,16.208 h1 r270
  text "COM" at 28.954,15.619 h1
  text "PA4" at 1.42,12.652 h1 r270
  text "Sig" at 3.709,12.626 h1 r270
  text "Gnd" at 3.681,8.689 h1 r270
  text "UNR - ASL" at 40.149,2.148 h4
Mechanical 1:
  the board outline again, w0.254